# Altium PCB PCB1.pcbdoc
Units mil, origin at the board's own origin, x right, y up, seen from the top; angles counter-clockwise.
Board outline 4660 x 3510 mil, 2 copper layers (Top Layer, Bottom Layer); 56 components, 38 nets, 205 pads, 12 vias.
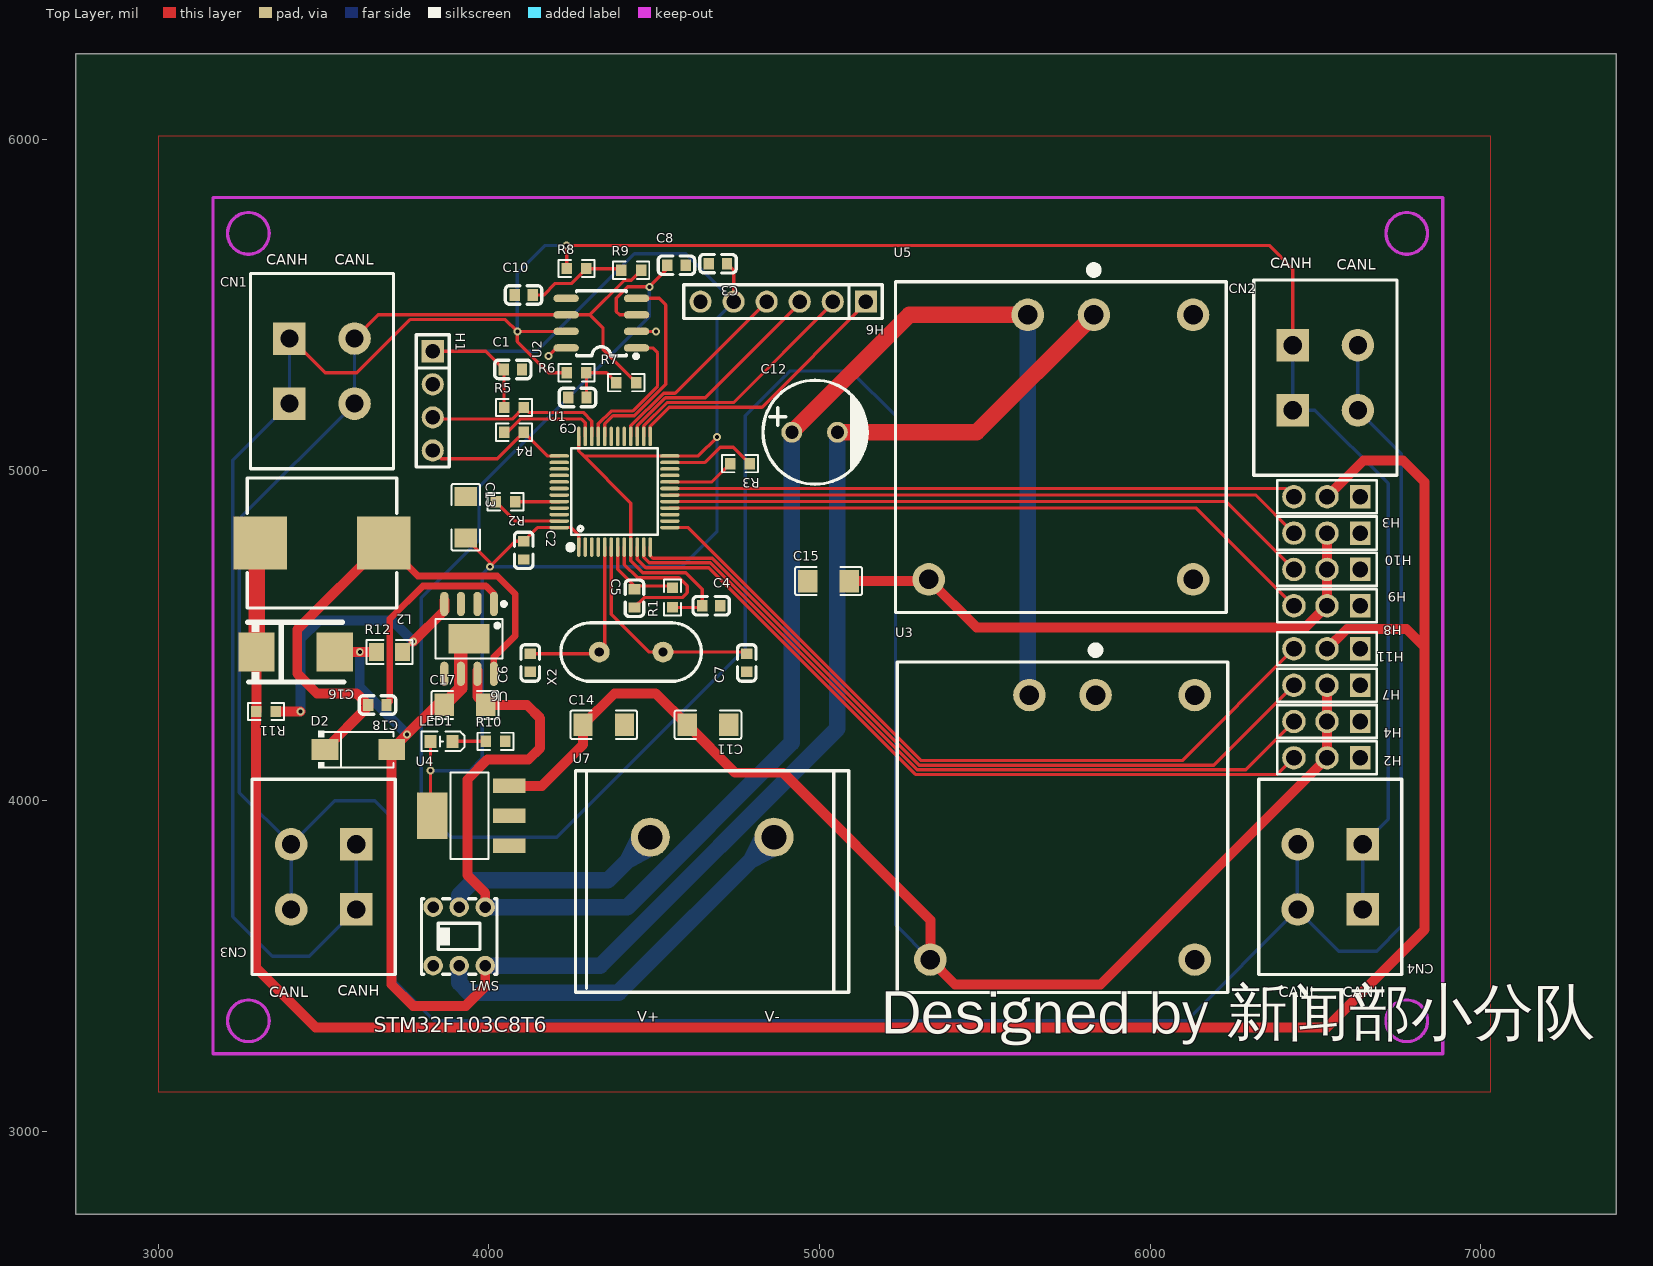
[diagram p0: Top Layer view]
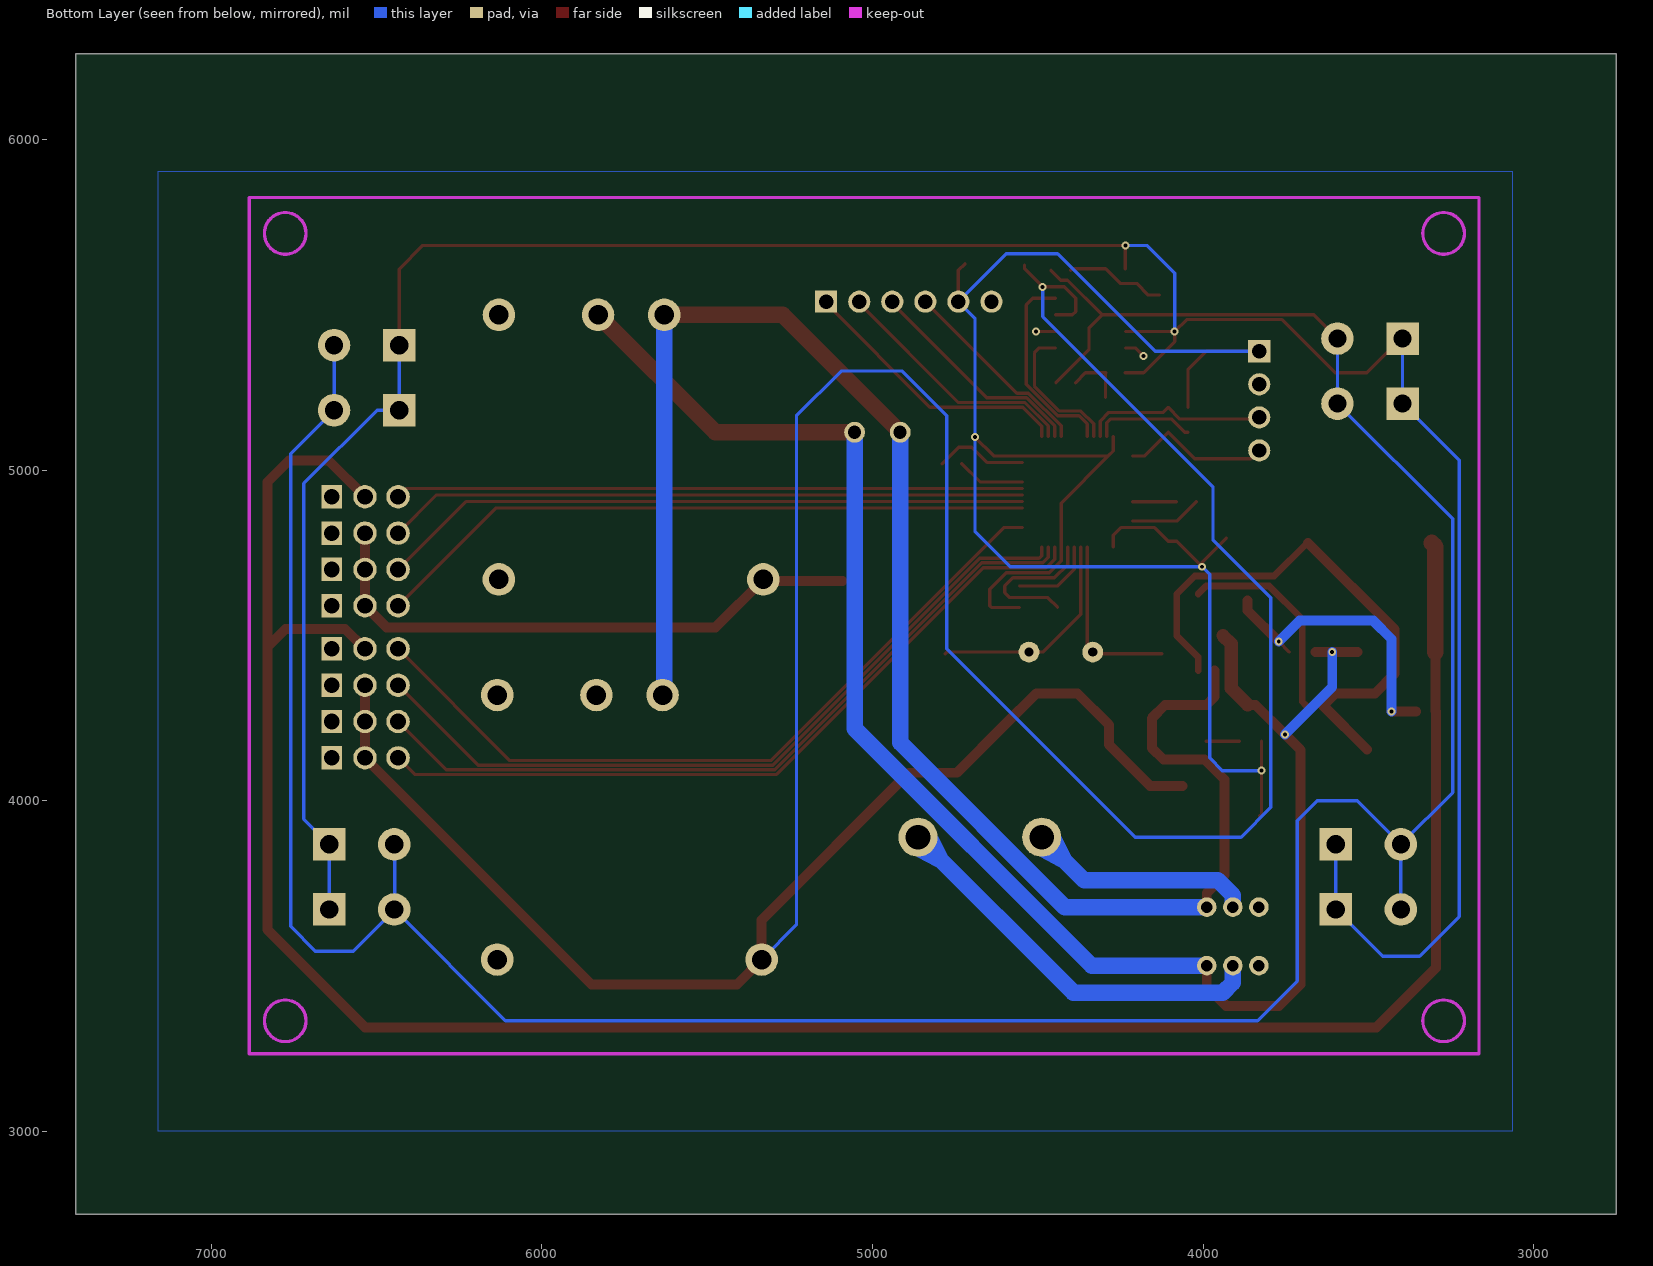
[diagram p1: Bottom Layer view, seen from below]

## Layer stack, top to bottom
Top Layer: signal copper (thickness not stored)
Dielectric: dielectric 12.6, FR-4, Dk 4.8
Bottom Layer: signal copper (thickness not stored)

## Board outline
7410,2750 2750,2750 2750,6260 7410,6260

## Components (designator, comment, footprint, x,y, rotation, side; value= is the part's Value field where it differs from the comment)
C1 "CC0603KRX7R9BB104" C0603 4072.44,5305 r0 top
C2 "CC0603KRX7R9BB104" C0603 4105,4757.56 r270 top
C3 "CC0603KRX7R9BB104" C0603 4692.44,5625 r180 top
C4 "CC0603KRX7R9BB104" C0603 4672.56,4590 r0 top
C5 "CC0603KRX7R9BB104" C0603 4440,4612.56 r270 top
C6 "CC0603JRNPO9BN220" C0603 4125,4417.56 r90 top
C7 "CC0603JRNPO9BN220" C0603 4780,4417.56 r90 top
C8 "CC0603KRX7R9BB104" C0603 4567.44,5620 r0 top
C9 "CL10B473KB8NNNC" C0603 4267.44,5220 r180 top
C10 "CL10B473KB8NNNC" C0603 4105,5530 r0 top
C11 "CL31A106KBHNNNE" C1206 4662.3,4230 r180 top
C12 "KM107M050F12RR0VH2FP0" CAP-TH_BD8.0-P3.50-D0.6-FD 4985,5115 r0 top
C13 "CL31A106KBHNNNE" C1206 3930,4857.7 r270 top
C14 "CL31A106KBHNNNE" C1206 4347.3,4230 r0 top
C15 "CL31A106KBHNNNE" C1206 5027.3,4665 r0 top
C16 "TAJD157K016RNJ" CASE-D_7343 3415,4450 r180 top
C17 "CL31A226KAHNNNE" C1206 3927.3,4290 r0 top
C18 "CC0603KRX7R9BB103" C0603 3662.56,4290 r180 top
CN1 "XY115A-5.0-2P" CONN-TH_XY115A-5.0-2P 3495,5300 r0 top
CN2 "XY115A-5.0-2P" CONN-TH_XY115A-5.0-2P 6530,5280 r0 top
CN3 "XY115A-5.0-2P" CONN-TH_XY115A-5.0-2P 3500,3770 r180 top
CN4 "XY115A-5.0-2P" CONN-TH_XY115A-5.0-2P 6545,3770 r180 top
D2 "SS24FL_C111630" SMA_L4.4-W2.8-LS5.4-RD 3605,4155 r0 top
H1 "PZ254V-11-04P" HDR-TH_4P-P2.54-V-M 3830,5210 r270 top
H2 "2.54-1*3P针" HDR-TH_3P-P2.54-V-M-1 6535,4130 r180 top
H3 "2.54-1*3P针" HDR-TH_3P-P2.54-V-M-1 6535,4920 r180 top
H4 "2.54-1*3P针" HDR-TH_3P-P2.54-V-M-1 6535,4240 r180 top
H6 "PZ254V-11-06P" HDR-TH_6P-P2.54-V-M 4890,5510 r180 top
H7 "2.54-1*3P针" HDR-TH_3P-P2.54-V-M-1 6535,4350 r180 top
H8 "2.54-1*3P针" HDR-TH_3P-P2.54-V-M-1 6535,4590 r180 top
H9 "2.54-1*3P针" HDR-TH_3P-P2.54-V-M-1 6535,4700 r180 top
H10 "2.54-1*3P针" HDR-TH_3P-P2.54-V-M-1 6535,4810 r180 top
H11 "2.54-1*3P针" HDR-TH_3P-P2.54-V-M-1 6535,4460 r180 top
L2 "MWSA1004S-220MT" IND-SMD_L11.5-W10.0_FXL1040 3495,4780 r180 top
LED1 "NCD0603R1_C84263" LED0603-FD 3856.53,4180 r0 top
R1 "RC0603FR-0710KL" R0603 4555,4614.66 r90 top
R2 "RC0603FR-0710KL" R0603 4050.34,4905 r180 top
R3 "RC0603FR-0710KL" R0603 4759.66,5020 r180 top
R4 "RC0603FR-0710KL" R0603 4075.34,5115 r180 top
R5 "RC0603FR-0710KL" R0603 4075.34,5190 r0 top
R6 "RTT0360R0FTP" R0603 4265,5295 r0 top
R7 "RTT0360R0FTP" R0603 4415.34,5265 r0 top
R8 "RTT0360R0FTP" R0603 4265.34,5610 r0 top
R9 "RTT0360R0FTP" R0603 4430.34,5605 r0 top
R10 "0603WAF510JT5E" R0603 4020.34,4180 r0 top
R11 "0603WAF1002T5E" R0603 3325.34,4270 r180 top
R12 "0805W8F1801T5E" R0805 3699.37,4450 r0 top
SW1 "PS-5850A-6PL" SW-TH_6P-L5.8-W5.8-P2.00-LS4.5-BL 3910,3590 r180 top
U1 "STM32F103C8T6" LQFP-48_L7.0-W7.0-P0.50-LS9.0-BL 4380,4935 r0 top
U2 "TJA1050T/CM,118" SOIC-8_L5.0-W4.0-P1.27-LS6.0-BL 4340,5445 r90 top
U3 "URB2405YMD-10WR3_C91825" PWRM-TH_URB2405YMD_10WR3 5735,3920 r0 top
U4 "AMS1117-3.3_1" SOT-223-3_L6.4-W3.5-P2.30-LS7.0-BR 3945,3955 r0 top
U5 "URB2405YMD-10WR3_C91825" PWRM-TH_URB2405YMD_10WR3 5730,5070 r0 top
U6 "TPS5430DDA" ESOP-8_L4.9-W3.9-P1.27-LS6.0-BL-EP-2 3940,4490 r180 top
U7 "DBT50G-9.5-2P" CONN-TH_2P-P9.50_DBT50G-9.5-2P 4675,3890 r0 top
X2 "X49SD8MSD2SC" OSC-TH_L10.0-W4.5-P5.00 4430,4450 r90 top

## Footprints (in the part's own frame and the unit in brackets; to place one, negate y for a bottom-side part, rotate by r counter-clockwise, add the part's x,y. Pads: shape width x height; smd on the part's side, far side on the other; paste and mask are expansions set on the pad)
C0603 [mm]
  rect 0.8x0.9 smd paste+0 mask+0.051: 1(-0.7,0) 2(0.7,0)
  silkscreen extent -1.41,-0.71 1.39,0.72
C1206 [mm]
  rect 1.485x1.728 smd paste-100 mask+0.051: 1(-1.593,0) 2(1.593,0)
  silkscreen extent -2.56,-1.09 2.56,1.09
CAP-TH_BD8.0-P3.50-D0.6-FD [mm]
  round 1.6 hole 1 paste+0 mask+0.051: 1(-1.75,0) 2(1.75,0)
  silkscreen extent -3.96,-4 4.04,4
CASE-D_7343 [mil]
  rect 110.2x118.5 smd paste+0 mask+2: 1(118.11,0) 2(-118.11,0)
  silkscreen extent -146,-91 146,91
CONN-TH_2P-P9.50_DBT50G-9.5-2P [mm]
  round 3 hole 1.9 paste+0 mask+0.051: 1(-4.75,0) 2(4.75,0)
  silkscreen extent -10.5,-11.9 10.5,5.1
CONN-TH_XY115A-5.0-2P [mm]
  rect 2.5x2.5 hole 1.4 paste+0 mask+0.051: 1(-2.5,-2.5) 1(-2.5,2.5)
  round 2.5 hole 1.4 paste+0 mask+0.051: 2(2.5,-2.5) 2(2.5,2.5)
  silkscreen extent -5.5,-7.5 5.5,7.5
ESOP-8_L4.9-W3.9-P1.27-LS6.0-BL-EP-2 [mm]
  oval 0.63x1.865 smd paste+0 mask+0.051: 1(-1.905,-2.683) 2(-0.635,-2.683) 3(0.635,-2.683) 4(1.905,-2.683) 5(1.905,2.682) 6(0.635,2.682) 7(-0.635,2.682) 8(-1.905,2.682)
  rect 3.15x2.26 smd paste+0 mask+0.05: 9(0,0)
  silkscreen extent -2.82,-2.83 2.58,1.52
HDR-TH_3P-P2.54-V-M-1 [mm]
  rect 1.575x1.8 hole 1.2 paste+0 mask+0.051: 1(-2.54,0)
  round 1.8 hole 1.2 paste+0 mask+0.051: 2(0,0) 3(2.54,0)
  silkscreen extent -3.81,-1.27 3.81,1.27
HDR-TH_4P-P2.54-V-M [mm]
  rect 1.7x1.7 hole 1.1 paste+0 mask+0.051: 1(-3.81,0)
  round 1.7 hole 1.1 paste+0 mask+0.051: 2(-1.27,0) 3(1.27,0) 4(3.81,0)
  silkscreen extent -5.08,-1.27 5.08,1.27
HDR-TH_6P-P2.54-V-M [mm]
  rect 1.7x1.7 hole 1.1 paste+0 mask+0.051: 1(-6.35,0)
  round 1.7 hole 1.1 paste+0 mask+0.051: 2(-3.81,0) 3(-1.27,0) 4(1.27,0) 5(3.81,0) 6(6.35,0)
  silkscreen extent -7.6,-1.3 7.65,1.3
IND-SMD_L11.5-W10.0_FXL1040 [mm]
  rect 4.1x4.1 smd paste+0 mask+0.051: 1(-4.75,0) 2(4.75,0)
  silkscreen extent -5.75,-5 5.75,5
LED0603-FD [mm]
  rect 0.9x1 smd paste+0 mask+0.051: 1(-0.85,0) 2(0.85,0)
  silkscreen extent -1.55,-0.75 1.75,0.75
LQFP-48_L7.0-W7.0-P0.50-LS9.0-BL [mm]
  oval 0.27x1.5 smd paste+0 mask+0.05: 1(-2.75,-4.25) 2(-2.25,-4.25) 3(-1.75,-4.25) 4(-1.25,-4.25) 5(-0.75,-4.25) 6(-0.25,-4.25) 7(0.25,-4.25) 8(0.75,-4.25) 9(1.25,-4.25) 10(1.75,-4.25) 11(2.25,-4.25) 12(2.75,-4.25) 25(2.75,4.25) 26(2.25,4.25) 27(1.75,4.25) 28(1.25,4.25) 29(0.75,4.25) 30(0.25,4.25) 31(-0.25,4.25) 32(-0.75,4.25) 33(-1.25,4.25) 34(-1.75,4.25) 35(-2.25,4.25) 36(-2.75,4.25)
  oval 1.5x0.27 smd paste+0 mask+0.05: 13(4.25,-2.75) 14(4.25,-2.25) 15(4.25,-1.75) 16(4.25,-1.25) 17(4.25,-0.75) 18(4.25,-0.25) 19(4.25,0.25) 20(4.25,0.75) 21(4.25,1.25) 22(4.25,1.75) 23(4.25,2.25) 24(4.25,2.75) 37(-4.25,2.75) 38(-4.25,2.25) 39(-4.25,1.75) 40(-4.25,1.25) 41(-4.25,0.75) 42(-4.25,0.25) 43(-4.25,-0.25) 44(-4.25,-0.75) 45(-4.25,-1.25) 46(-4.25,-1.75) 47(-4.25,-2.25) 48(-4.25,-2.75)
  silkscreen extent -3.59,-4.46 3.3,3.34
OSC-TH_L10.0-W4.5-P5.00 [mm]
  round 1.6 hole 0.7 paste+0 mask+0.051: 1(0,2.45) 2(0,-2.45)
  silkscreen extent -2.25,-5.39 2.25,5.39
PWRM-TH_URB2405YMD_10WR3 [mm]
  round 2.5 hole 1.5 paste+0 mask+0.051: 1(2.537,10.161) 2(-2.543,10.161) 3(-10.16,-10.161) 5(10.16,-10.161) 6(10.157,10.161)
  silkscreen extent -12.7,-12.7 12.7,13.91
R0603 [mil]
  rect 31.75x34.02 smd paste-3937.01 mask+2: 1(-29.66,0) 2(29.66,0)
  silkscreen extent -55,-26 55,26
R0805 [mm]
  rect 1.133x1.377 smd paste-100 mask+0.051: 1(-1,0) 2(1,0)
  silkscreen extent -1.76,-0.92 1.76,0.92
SMA_L4.4-W2.8-LS5.4-RD [mil]
  rect 80.57x63.78 smd paste+0 mask+2: 1(-101,0) 2(101,0)
  silkscreen extent -121,-57 106,57
SOIC-8_L5.0-W4.0-P1.27-LS6.0-BL [mil]
  oval 22.38x76.78 smd paste+0 mask+2: 1(-75,-106.5) 2(-25,-106.5) 3(25,-106.5) 4(75,-106.5) 5(75,106.5) 6(25,106.5) 7(-25,106.5) 8(-75,106.5)
  silkscreen extent -106,-111 98,75
SOT-223-3_L6.4-W3.5-P2.30-LS7.0-BR [mm]
  rect 2.5x1.1 smd paste+0 mask+0.051: 1(2.97,-2.3) 2(2.97,0) 3(2.97,2.3)
  rect 2.34x3.6 smd paste+0 mask+0.051: 4(-2.97,0)
  silkscreen extent -1.57,-3.33 1.37,3.33
SW-TH_6P-L5.8-W5.8-P2.00-LS4.5-BL [mm]
  round 1.5 hole 0.9 paste+0 mask+0.05: 1(-2,-2.25) 2(0,-2.25) 3(2,-2.25) 4(-2,2.25) 5(0,2.25) 6(2,2.25)
  silkscreen extent -2.9,-2.9 2.9,2.9

## Via types
v1: diameter 24.02, hole 12.01, Top Layer to Bottom Layer, 12 vias

## Nets (pads, with @x,y where several pads share a name; then routed paths per layer and width w, separated by ;. In a path a pad name is that pad's centre, name@x,y a point inside that pad or via, vN(x,y) a via of type N, cw(c..) or ccw(c..) an arc to the next point about the centre after c; other vN are vias at no path point)
$1N1488: R2.1 U1.44 | length 132.9
  Top Layer w10: R2.1 4212.21,4905 U1.44
$1N1611: R3.2 U1.20 | length 205.7
  Top Layer w10: U1.20 4674.53,4964.53 R3.2
$1N1975: C9.1 R6.2 R7.1 | length 178.6
  Top Layer w10: C9.1 4295,5294.66 R6.2 4355.68,5295 R7.1
$1N2045: C10.2 R8.2 R9.1 | length 303.3
  Top Layer w10: C10.2 4165.31,5530 4200.31,5565 4250,5565 R8.2 4395.68,5610 R9.1
$1N4796: LED1.2 R10.1 | length 100.7
  Top Layer w10: LED1.2 R10.1
$1N5061: CN1.1 CN2.1 CN3.1 CN4.1 R6.1 R8.1 U2.7 | length 8462.5
  Top Layer w10: CN1.1@3396.57,5398.43 3401.57,5398.43 3505,5295 3600,5295 3761,5456 4049.68,5456 v1(4085.68,5420) ; U2.7 v1(4085.68,5420) ; R6.1 4180,5295 4085.68,5389.32 v1(4085.68,5420) ; R8.1 4235,5610.68 v1(4235,5680) 6360,5680 6431.57,5608.43 CN2.1@6431.57,5378.43
  Bottom Layer w10: CN1.1@3396.57,5398.43 3396.57,5201.57 3225,5030 3225,3650 3345,3530 3456.85,3530 3598.43,3671.57 CN3.1@3598.43,3868.43 ; v1(4085.68,5420) 4085.68,5595.68 4170,5680 v1(4235,5680) ; CN2.1@6431.57,5378.43 6431.57,5181.57 6498.43,5181.57 6720,4960 6720,3945 6643.43,3868.43 CN4.1@6643.43,3671.57
$1N5080: CN1.2 CN2.2 CN3.2 CN4.2 R7.2 R9.2 U2.6 | length 9359.5
  Top Layer w10: CN1.2@3593.43,5398.43 3665,5470 U2.6 4305,5470 ; R7.2 4345,5365 4345,5430 4305,5470 ; R9.2 4430,5575 4410,5575 4305,5470
  Bottom Layer w10: CN3.2@3401.57,3671.57 CN3.2@3401.57,3868.43 ; CN1.2@3593.43,5398.43 3593.43,5201.57 3245,4853.15 3245,4025 CN3.2@3401.57,3868.43 ; CN4.2@6446.57,3868.43 6445,3866.85 6445,3673.15 CN4.2@6446.57,3671.57 ; CN2.2@6628.43,5378.43 6628.43,5181.57 6760,5050 6760,3620 6685,3545 6570,3545 6446.57,3668.43 CN4.2@6446.57,3671.57 ; CN3.2@3401.57,3868.43 3533.15,4000 3655,4000 3715,3940 3715,3455 3835,3335 6110,3335 CN4.2@6446.57,3671.57
$1N23835: R11.1 R12.2 U6.4 | length 892.7
  Top Layer w10: R12.2 v1(3771,4482.26)
  Top Layer w30: R11.1 v1(3430,4270) ; v1(3771,4482.26) 3865,4576.26 U6.4@3865,4605.61
  Bottom Layer w30: v1(3430,4270) 3430,4490 3485,4545 3708.27,4545 v1(3771,4482.26)
$1N23837: C18.2 D2.1 L2.1 U6.8 | length 1666.9
  Top Layer w20: L2.1 3685,4780 3784.87,4680.13 4024.87,4680.13 4080,4625 4080,4500 4015,4435 U6.8@4015,4394.39
  Top Layer w30: D2.1 3635,4286 C18.2 3600,4325 3480,4325 3420,4385 3420,4517.99 L2.1
$1N23840: C18.1 U6.1 | length 630.6
  Top Layer w20: C18.1 3700,4299.88 3700,4550 3800,4650 3990.62,4650 U6.1@4015,4625.61
+3.3V: C1.1 C2.1 C3.1 C4.1 C13.2 H1.1 H6.5 LED1.1 R1.1 R5.1 U1.1 U1.9 U1.24 U1.36 U1.48 U4.4 | length 5745.7
  Top Layer w10: LED1.1 v1(3823.07,4091.45) 3823.07,3960 U4.4 ; H1.1 3989.88,5360 C1.1 4045.68,5304.2 R5.1 ; C13.2 4002.72,4722.28 v1(4002.72,4708.12) 4079.72,4785.12 C2.1 4146.61,4826.73 U1.48 4248.27,4826.73 4271.73,4803.27 U1.1 ; U1.36 4271.73,5058.27 4286.73,5043.27 ; R1.1 4640,4585 C4.1 4645,4640 4595,4690 4465,4690 4429.21,4725.79 U1.9 4429.21,4900.79 4286.73,5043.27 ; v1(4690,5100) 4633.27,5043.27 U1.24 4286.73,5043.27 ; C3.1 4740,5605 H6.5
  Bottom Layer w10: v1(3823.07,4091.45) 3941.45,4091.45 3980,4130 3980,4685.4 v1(4002.72,4708.12) 4583.12,4708.12 4690,4815 v1(4690,5100) 4690,5460 H6.5 4595,5655 4440,5655 4145,5360 H1.1
+5V1: C15.2 H8.2 H9.2 H10.2 U5.3 | length 1754
  Top Layer w30: C15.2 5325.05,4665 U5.3 5474.95,4525 6470,4525 H8.2 H9.2 H10.2
+5V2: C8.1 C11.2 C14.1 H2.2 H4.2 H7.2 U2.3 U3.3 U4.3 | length 9945.2
  Top Layer w10: U2.3 4395,5470 4385,5480 4385,5520 4420,5555 v1(4485,5555) 4539.88,5609.88 C8.1
  Top Layer w30: U4.3 4160.55,4045.55 4284.6,4169.6 C14.1 4379.6,4325 4504.6,4325 C11.2 4744.6,4085 4890,4085 5335,3640 U3.3 5409.95,3445 5850,3445 H2.2 H4.2 H7.2
  Bottom Layer w10: v1(4485,5555) 4485,5465 3970,4950 3970,4790 3795,4615 3795,3980 3885,3890 4205,3890 4775,4460 4775,5165 4910,5300 5095,5300 5230,5165 5230,3624.95 U3.3
+8V: C16.1 H3.2 H11.2 L2.2 R11.2 | length 7086.3
  Top Layer w30: R11.2@3295,4269.32 3295,3495 3475,3315 6535,3315 6830,3610 6830,4465 ; R11.2 3296.89,4271.21 C16.1 ; H11.2 6595,4520 6775,4520 6830,4465 ; H3.2 6645,5030 6765,5030 6830,4965 6830,4465
  Top Layer w50: C16.1 3296.89,4768.9 L2.2
CAN_RX: U1.32 U2.4 | length 609.5
  Top Layer w10: U1.32 4350,5102.79 4350,5140 4375,5165 4440.18,5165 4535,5259.82 4535,5500 4515,5520 U2.4
CAN_TX: U1.33 U2.1 | length 434.8
  Top Layer w10: U1.33 4330.79,5140.61 4369.19,5179.02 4434.37,5179.02 4510,5254.64 4510,5355 4495,5370 U2.1
D1: H7.3 U1.12 | length 2335.4
  Top Layer w10: U1.12 4488.27,4741.73 4495.98,4734.02 4675.63,4734.02 5301.61,4108.03 6193.03,4108.03 H7.3
D2: H4.3 U1.11 | length 2324.2
  Top Layer w10: U1.11 4468.58,4736.42 4485,4720 4669.82,4720 5295.81,4094.02 6289.02,4094.02 H4.3
D3: H2.3 U1.10 | length 2313.1
  Top Layer w10: U1.10 4448.9,4731.1 4475,4705 4665,4705 5290,4080 6385,4080 H2.3
D4: H11.3 U1.13 | length 2319.6
  Top Layer w10: U1.13 4602.73,4826.73 5307.42,4122.05 6097.05,4122.05 H11.3
D5: H8.3 U1.16 | length 2010.2
  Top Layer w10: U1.16 6139.21,4885.79 H8.3
D6: H9.3 U1.17 | length 1972.8
  Top Layer w10: U1.17 6229.53,4905.47 H9.3
D7: H10.3 U1.18 | length 1935.4
  Top Layer w10: U1.18 6319.84,4925.16 H10.3
D8: H3.3 U1.19 | length 1898
  Top Layer w10: U1.19 6410.16,4944.84 H3.3
E: H6.2 U1.26 | length 756.7
  Top Layer w10: U1.26 4468.58,5133.94 4539.64,5205 4740,5205 H6.2@5040,5505
GND: C1.2 C2.2 C3.2 C4.2 C5.2 C6.1 C7.1 C8.2 C9.2 C10.1 C11.1 C12.2 C13.1 C14.2 C15.1 C16.2 C17.1 D2.2 H1.2 H2.1 H3.1 H4.1 H6.6 H7.1 H8.1 H9.1 H10.1 H11.1 R2.2 R3.1 R4.2 R10.2 R12.1 SW1.4 U1.8 U1.23 U1.35 U1.47 U2.2 U2.8 U3.1 U3.5 U4.1 U5.1 U5.5 U6.6 U6.9 | length 6578
  Top Layer w10: R2.2 4079.26,4846.42 U1.47 ; R4.2 4055,5115 4095,5155 4280,5155 4291.42,5143.58 U1.35 ; v1(4180,5345) 4205,5370 U2.8 ; 4409.53,4714.77 4409.53,4714.88 ; U1.8 4409.53,4715.12 4409.65,4715 4409.53,4714.88 ; C5.2 4470,4615 4585,4615 4600,4630 4600,4650 4575,4675 4449.41,4675 4409.53,4714.88 ; U2.2 v1(4505,5420) ; U1.23 4653.58,5023.58 4700,5070 4739.32,5070 R3.1
  Top Layer w30: C16.2 v1(3609.21,4450) R12.1 ; C17.1 3841,4290 v1(3752.36,4201.36) D2.2 3705,4154 3705,3445 3770,3380 3930,3380 3988.74,3438.74 SW1.4
  Top Layer w40: C17.1 3915,4340.4 U6.6 3915,4475 U6.9@3940,4500
  Top Layer w50: C12.2 5474.85,5115 U5.1
  Bottom Layer w30: v1(3609.21,4450) 3609.21,4344.51 v1(3752.36,4201.36)
  Bottom Layer w50: SW1.4 4336.42,3501.42 5053.9,4218.9 C12.2
NRST: C5.1 R1.2 U1.7 | length 253.6
  Top Layer w10: U1.7 4390,4767.52 4390,4700 4439.88,4650.12 4440,4650.12 4554.54,4650.12 R1.2@4555,4649.66
OSC1: C6.2 U1.5 X2.1 | length 535.3
  Top Layer w10: C6.2 4328.66,4445.12 X2.1 4350.47,4466.93 U1.5
OSC2: C7.2 U1.6 X2.2 | length 662.3
  Top Layer w10: U1.6 4370.16,4564.84 4485,4450 X2.2 4775.12,4450 C7.2
PGND: SW1.5 U7.2 | length 1210.5
  Bottom Layer w50: SW1.5 3910,3450 3940,3420 4392.01,3420 U7.2
POW: SW1.2 U7.1 | length 688.1
  Bottom Layer w50: SW1.2 3910,3715 3955,3760 4360,3760 4487.99,3887.99 U7.1
Q: H6.4 U1.28 | length 598.3
  Top Layer w10: U1.28 4429.21,5134.21 4528.03,5233.03 4563.03,5233.03 H6.4
R: H6.1 U1.25 | length 837
  Top Layer w10: U1.25 4488.27,5133.81 4545.45,5190.98 4825.98,5190.98 H6.1@5140,5505
SWCLK: H1.4 R4.1 U1.37 | length 455.9
  Top Layer w10: H1.4 3855,5035 4025,5035 R4.1 4176.73,5043.27 U1.37
SWDIO: H1.3 R5.2 U1.34 | length 561.3
  Top Layer w10: H1.3 3835,5155 4070,5155 R5.2 4120,5175 4285,5175 4311.1,5148.9 U1.34
VCC: C12.1 C17.2 SW1.1 U3.2 U5.2 U6.7 | length 5139.6
  Top Layer w30: U6.7@3965,4394.39 3965,4315 C17.2 4115,4290 4155,4250 4155,4160 4120,4125 3995,4125 3935,4065 3935,3775 3988.74,3721.26 SW1.1
  Top Layer w50: C12.1 5271.15,5470.05 U5.2
  Bottom Layer w50: SW1.1 4418.58,3678.58 4916.1,4176.1 C12.1 ; U5.2 5629.9,4325.05 U3.2
W: H6.3 U1.27 | length 676.5
  Top Layer w10: U1.27 4448.9,5134.08 4533.84,5219.02 4654.02,5219.02 H6.3@4940,5505
"": SW1.3 SW1.6 U1.2 U1.3 U1.4 U1.14 U1.15 U1.21 U1.22 U1.29 U1.30 U1.31 U1.38 U1.39 U1.40 U1.41 U1.42 U1.43 U1.45 U1.46 U2.5 U3.6 U4.2 U5.6 U6.2 U6.3 U6.5

## Polygon pours and split planes (outlines as drawn)
GND on Top Layer (solid, remove dead copper, pour order 0): 3000,3120 7030,3120 7030,6010 3000,6010
GND on Bottom Layer (solid, remove dead copper, pour order 1): 3065,3000 7160,3000 7160,5905 3065,5905

## Keep-outs
Board Outline Layer:
  circle w10 net "": c6776.26,3334.68 r62.99
  circle w10 net "": c3272.32,3334.68 r62.99
  circle w10 net "": c3272.32,5716.57 r62.99
  circle w10 net "": c6776.26,5716.57 r62.99
  lines w10 net "": 3165,3235 6885,3235 6885,5825 3165,5825 3165,3235

## Other copper
Bottom Layer:
  region net POW: 4428.98,3892.28 4399.91,3835.26 4436.11,3800.76 4493.11,3831.17
  region net PGND: 4803.07,3893.7 4773.34,3836.69 4808.7,3801.33 4865.71,3831.06

## Silkscreen, mask and mechanical layers (free items; w line width, h text height)
Top Silkscreen Layer:
  text "CANH" at 3325.8,5621.1 h32.45
  text "CANL" at 3533.35,5621.1 h32.45
  text "CANH" at 6363.35,5611.1 h32.45
  text "CANL" at 6564.7,5606.1 h32.45
  text "CANH" at 3543.35,3411.1 h32.45
  text "CANL" at 3334.7,3406.1 h32.45
  text "CANL" at 6389.7,3406.1 h32.45
  text "CANH" at 6583.35,3406.1 h32.45
  text "V+" at 4448.65,3331.1 h32.45
  text "V-" at 4833.65,3331.1 h32.45
  text "STM32F103C8T6" at 3651.17,3300.54 h45.43
  text "Designed by 新闻部小分队" at 5185.23,3295.08 h135.94